# EAGLE board Roomba2 (EAGLE 9.6.2)
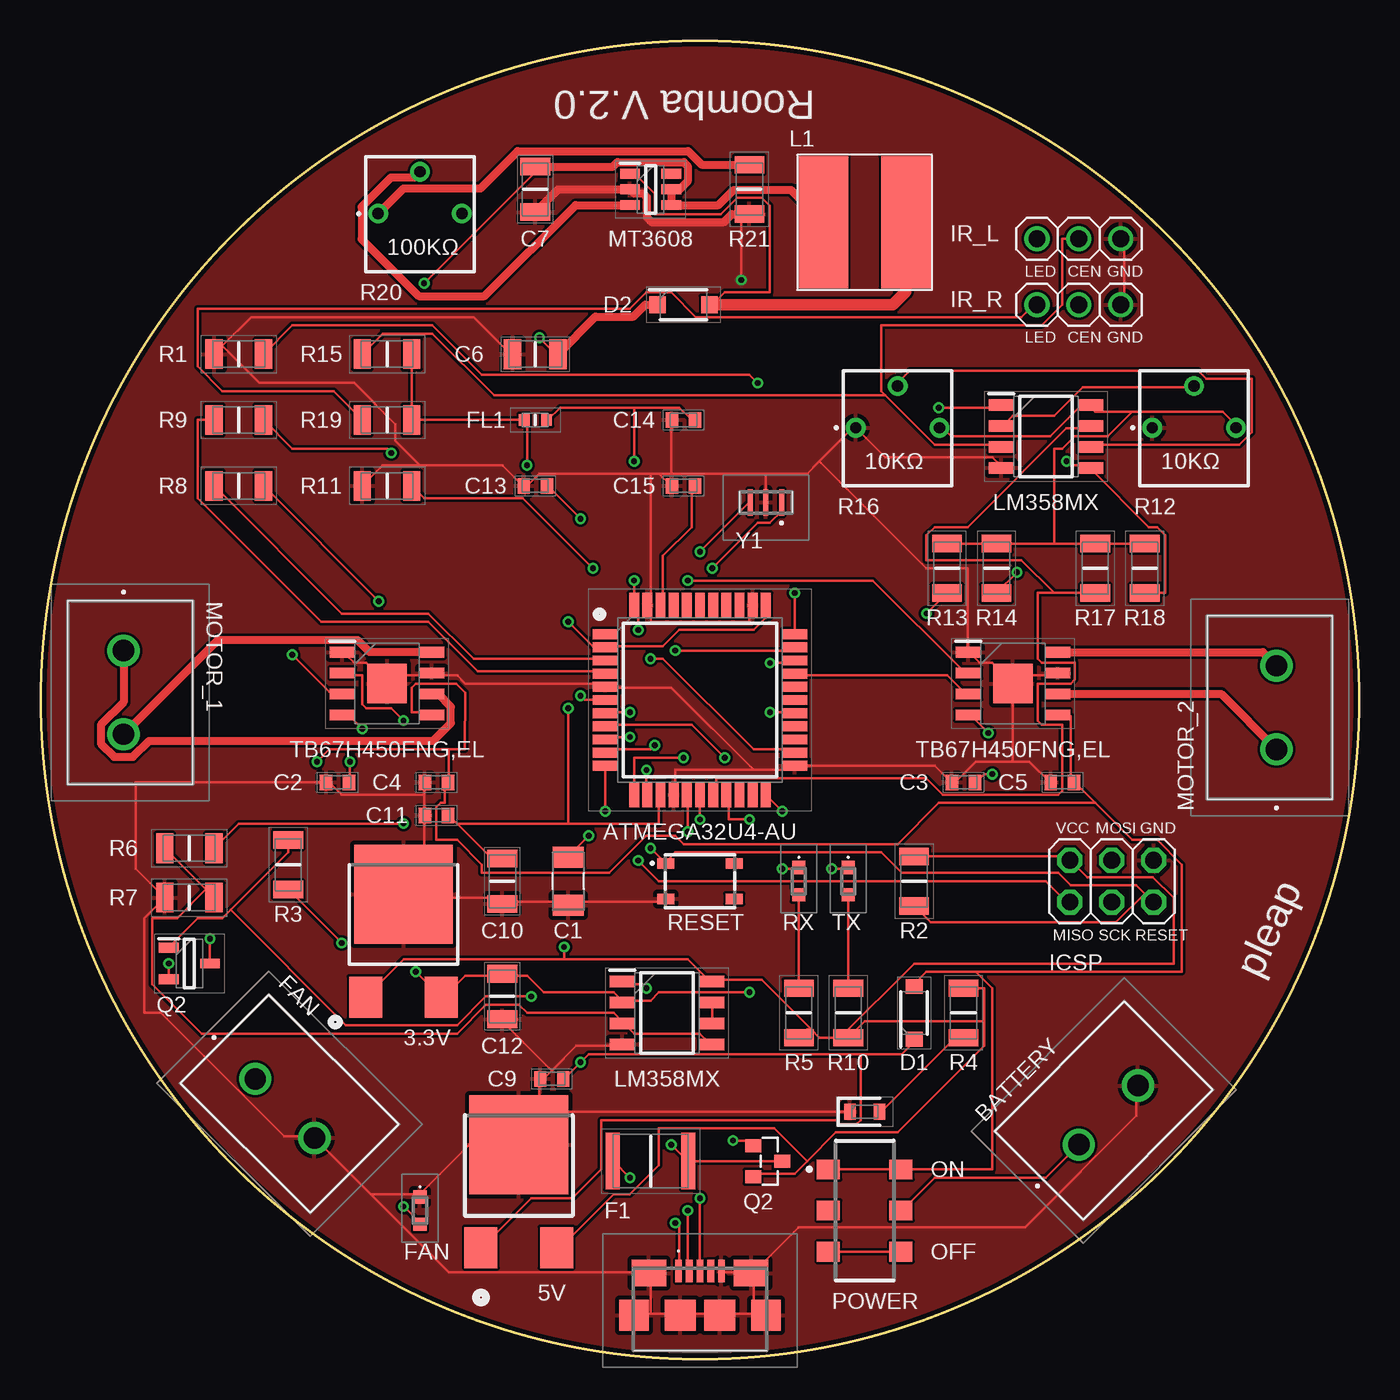
[diagram p0: board, top side]
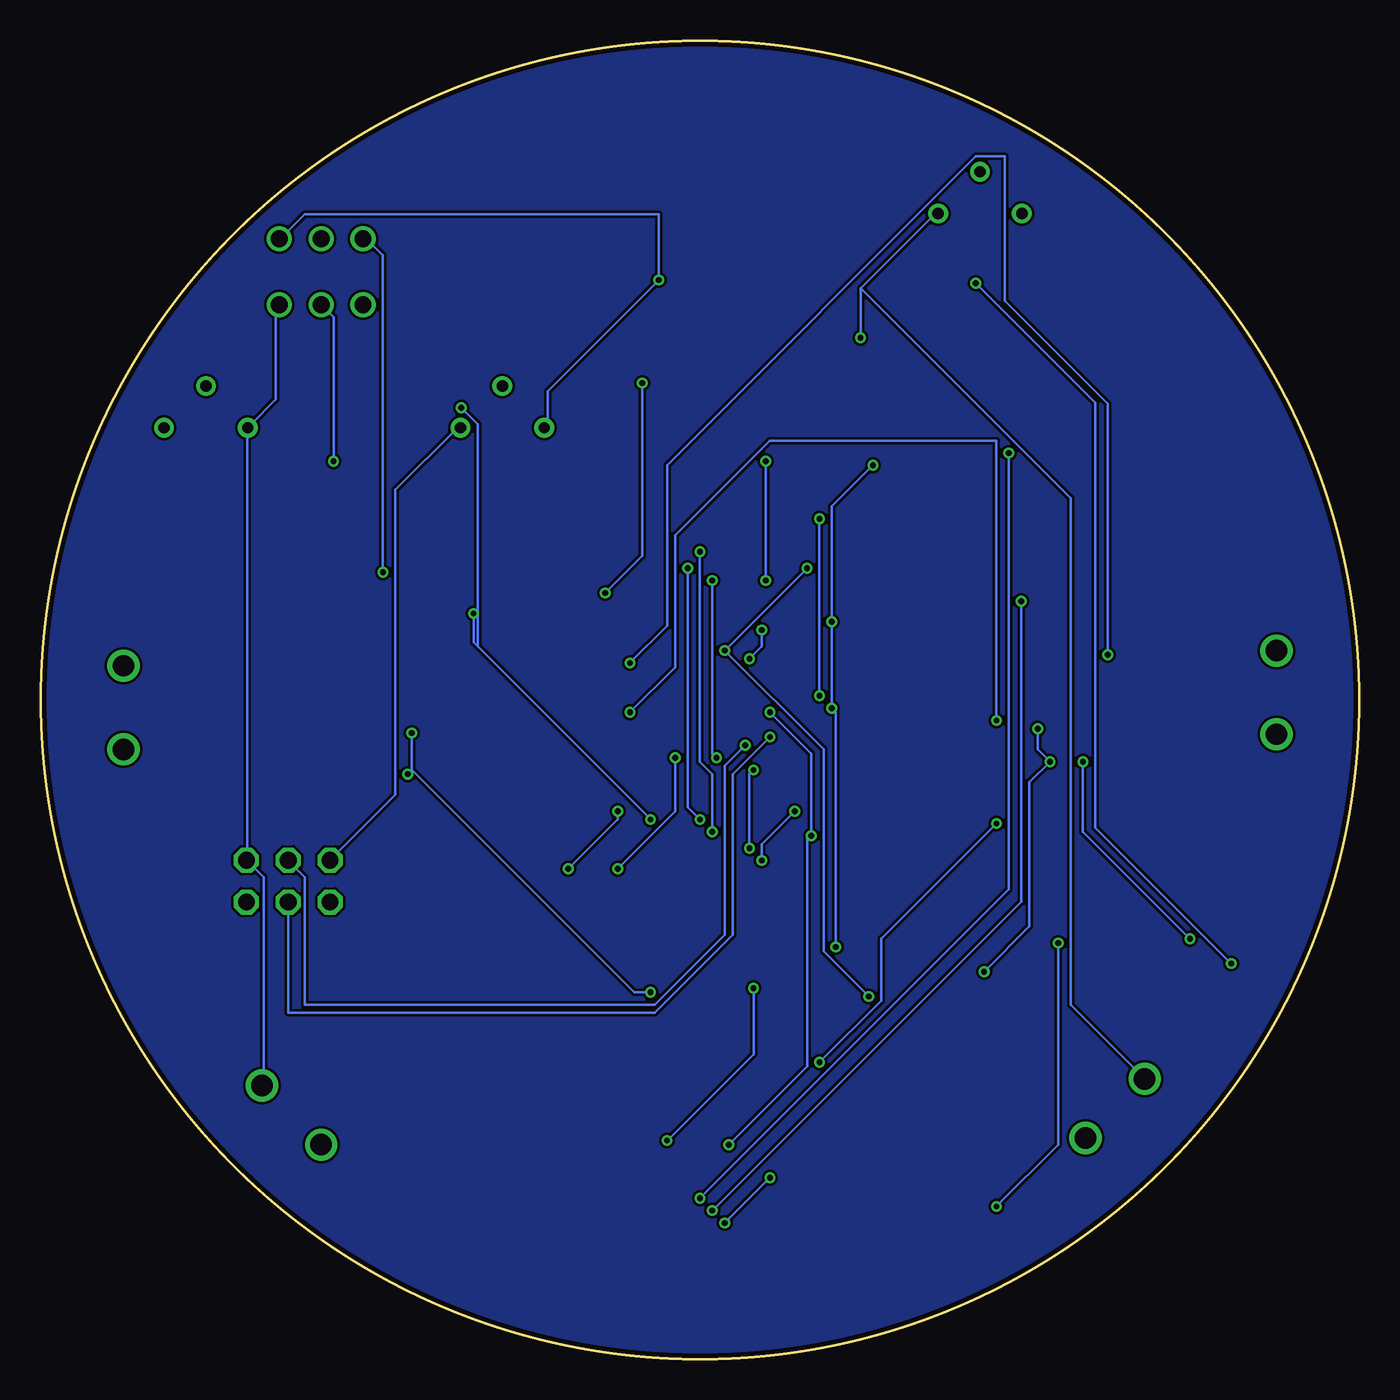
[diagram p1: board, bottom side, seen from below]

Size 80 x 80 mm. Coordinates in mm from the lower left corner, seen from the top.
Outline: circle at 40,40 radius 40
Copper layers (1*16): Top 0.035mm / dielectric 1.5mm / Bottom 0.035mm
Design rules "Fusion_PCB": minimum track width 6mil, minimum drill 12mil, track to track 6mil, track to pad 6mil, pad to pad 6mil, via to via 6mil, smd to smd 0mil, copper to edge 10mil, drill to drill 10mil, minimum pad ring 10mil, minimum via ring 6mil, stop-mask expansion 2mil, vias tented up to drill 100mil, thermal gap 10mil

## Footprints (pad centres in the part's own frame; a part is rotated, then mirrored left to right if it is on the bottom)
CAPC3216X190N = smd 1.29 x 1.91: 1 -1.46,0; 2 1.46,0
CAPC1608X90N = smd 0.75 x 0.94: 1 -0.7,0; 2 0.7,0
CAPC3216X180N = smd 1.07 x 1.82: 1 -1.38,0; 2 1.38,0
SODFL3516X90N = smd 0.9 x 1.04: 1 -1.6,0; 2 1.6,0
SODFL3618X108N = smd 1 x 1.04: 1 -1.575,0; 2 1.575,0
FUSC4632X110N = smd 0.85 x 3.43: 1 -2.3,0; 2 2.3,0
BLM18AG102BH1D = smd 0.65 x 0.7: 1 -0.675,0; 2 0.675,0
SOIC127P600X175-8N = smd 1.525 x 0.7: 1 -2.712,1.905; 2 -2.712,0.635; 3 -2.712,-0.635; 4 -2.712,-1.905; 5 2.712,-1.905; 6 2.712,-0.635; 7 2.712,0.635; 8 2.712,1.905
TO-252-3-L1_1 = smd 2 x 2.5: 1 -2.3,-6.25; 2 2.3,-6.25 | smd 6 x 6: 3 0,0
TO-252-3-L1 = smd 2 x 2.5: 1 -2.3,-8.05; 2 2.3,-8.05 | smd 6 x 6: 3 0,-1.8
QFP80P1200X1200X120-44N = smd 1.5 x 0.6: 1 -5.75,4; 2 -5.75,3.2; 3 -5.75,2.4; 4 -5.75,1.6; 5 -5.75,0.8; 6 -5.75,0; 7 -5.75,-0.8; 8 -5.75,-1.6; 9 -5.75,-2.4; 10 -5.75,-3.2; 11 -5.75,-4; 23 5.75,-4; 24 5.75,-3.2; 25 5.75,-2.4; 26 5.75,-1.6; 27 5.75,-0.8; 28 5.75,0; 29 5.75,0.8; 30 5.75,1.6; 31 5.75,2.4; 32 5.75,3.2; 33 5.75,4 | smd 0.6 x 1.5: 12 -4,-5.75; 13 -3.2,-5.75; 14 -2.4,-5.75; 15 -1.6,-5.75; 16 -0.8,-5.75; 17 0,-5.75; 18 0.8,-5.75; 19 1.6,-5.75; 20 2.4,-5.75; 21 3.2,-5.75; 22 4,-5.75; 34 4,5.75; 35 3.2,5.75; 36 2.4,5.75; 37 1.6,5.75; 38 0.8,5.75; 39 0,5.75; 40 -0.8,5.75; 41 -1.6,5.75; 42 -2.4,5.75; 43 -3.2,5.75; 44 -4,5.75
SOIC127P600X175-9N = smd 1.525 x 0.65: 1 -2.712,1.905; 2 -2.712,0.635; 3 -2.712,-0.635; 4 -2.712,-1.905; 5 2.712,-1.905; 6 2.712,-0.635; 7 2.712,0.635; 8 2.712,1.905 | smd 2.39 x 2.39: 9 0,0
TB11122U11 = drill 1.3 pad 1.95: 1 0,0; 2 5.08,0
ZX62B5PA33 = smd 0.4 x 1.35: 1 -1.3,2.325; 2 -0.65,2.325; 3 0,2.325; 4 0.65,2.325; 5 1.3,2.325 | smd 1.8 x 1.9: MP1 -4,-0.35; MP2 4,-0.35 | smd 2.1 x 1.6: MP3 -3.1,2.2; MP4 3.1,2.2 | smd 1.9 x 1.9: MP5 -1.2,-0.35; MP6 1.2,-0.35
2X03 = drill 1.016 octagon: 1 -2.54,-1.27; 2 -2.54,1.27; 3 0,-1.27; 4 0,1.27; 5 2.54,-1.27; 6 2.54,1.27
1X03 = drill 1.016: 1 -2.54,0; 2 0,0; 3 2.54,0
INDUCTOR_22UH = smd 3 x 8: P$1 -2.5,0; P$2 2.5,0
SMLE12Y8WT86 = smd 0.8 x 0.8: 1 0,0.825; 2 0,-0.825
LEDC1608X36N = smd 0.7 x 0.95: 1 -0.9,0; 2 0.9,0
SOT95P280X125-3N = smd 1.2 x 0.6: 1 -1.25,0.95; 2 -1.25,-0.95; 3 1.25,0
SOT95P237X112-3N = smd 0.972 x 0.802: 1 -0.772,0.94; 2 -0.772,-0.94; 3 0.99,0
RESC3216X60N = smd 1.05 x 1.8: 1 -1.5,0; 2 1.5,0
3362P_1 = drill 0.69 pad 1.12: 1 -2.54,3.53; 2 0,6.07; 3 2.54,3.53
SSSS213202 = smd 1.2 x 1.4: 1 -2.5,-2.2; 2 0,-2.2; 3 2.5,-2.2; 4 -2.5,2.2; 5 0,2.2; 6 2.5,2.2
SMT(4.2X3.2) = smd 1.05 x 0.65: 1 -2.075,1.075; 2 2.075,1.075; 3 -2.075,-1.075; 4 2.075,-1.075
SOT95P280X145-6N = smd 1.2 x 0.6: 1 -1.25,0.95; 2 -1.25,0; 3 -1.25,-0.95; 4 1.25,-0.95; 5 1.25,0; 6 1.25,0.95
CSTCE16M0V53R0 = smd 0.3 x 1.6: 1 0.95,0; 2 0,0; 3 -0.95,0

## Placement (x,y rotation side)
C1  GRM31CR61A107MEA8L  [CAPC3216X190N]  32,29 90 top
C2  GRM188F11H104ZA01B  [CAPC1608X90N]  18,35 0 top
C3  GRM188F11H104ZA01B  [CAPC1608X90N]  56,35 0 top
C4  GRM188F11H104ZA01B  [CAPC1608X90N]  24,35 0 top
C5  GRM188F11H104ZA01B  [CAPC1608X90N]  62,35 0 top
C6  GRM31CB31E226KE15L  [CAPC3216X180N]  30,61 0 top
C7  GRM31CB31E226KE15L  [CAPC3216X180N]  30,71 90 top
C9  GRM188F11H104ZA01B  [CAPC1608X90N]  31,17 0 top
C10  GRM31CB31A476KE15L  [CAPC3216X180N]  28,29 90 top
C11  GRM188F11H104ZA01B  [CAPC1608X90N]  24,33 0 top
C12  GRM31CB31A476KE15L  [CAPC3216X180N]  28,22 90 top
C13  GRM188R71E105KA12D  [CAPC1608X90N]  30,53 0 top
C14  GRM188R71E105KA12D  [CAPC1608X90N]  39,57 0 top
C15  GRM188F11H104ZA01B  [CAPC1608X90N]  39,53 0 top
D1  RB160M-30TR  [SODFL3516X90N]  53,21 90 top
D2  SS2040FL  [SODFL3618X108N]  39,64 0 top
F1  MF-MSMF010-2  [FUSC4632X110N]  37,12 0 top
FL1  BLM18PG600SN1D  [BLM18AG102BH1D]  30,57 0 top
IC1  LM358MX  [SOIC127P600X175-8N]  61,56 0 top
IC9  LM358MX  [SOIC127P600X175-8N]  38,21 0 top
IC10  NJM2391DL1-05-TE1  [TO-252-3-L1_1]  29,13 0 top
IC11  NJM2391DL1-33-TE1  [TO-252-3-L1]  22,30 0 top
IC12  ATMEGA32U4-AU  [QFP80P1200X1200X120-44N]  40,40 0 top
IC13  TB67H450FNG,EL  [SOIC127P600X175-9N]  21,41 0 top
IC14  TB67H450FNG,EL  [SOIC127P600X175-9N]  59,41 0 top
J1  TB111-2-2-U-1-1  [TB11122U11]  13,17 315 top
J2  TB111-2-2-U-1-1  [TB11122U11]  63,13 45 top
J4  ZX62-B-5PA_33_  [ZX62B5PA33]  40,3 0 top
J7  TB111-2-2-U-1-1  [TB11122U11]  5,43 270 top
J8  TB111-2-2-U-1-1  [TB11122U11]  75,37 90 top
JP1  ICSP  [2X03]  65,29 0 top
JP3  IR_L  [1X03]  63,68 0 top
JP4  IR_R  [1X03]  63,64 0 top
L1  INDUCTOR_22UH  [INDUCTOR_22UH]  50,69 0 top
LED1  SML-E12Y8WT86  [SMLE12Y8WT86]  23,9 0 top
LED2  SML-E12P8WT86  [LEDC1608X36N]  50,15 0 top
LED3  SML-E12Y8WT86  [SMLE12Y8WT86]  46,29 0 top
LED4  SML-E12Y8WT86  [SMLE12Y8WT86]  49,29 0 top
Q1  AO3400A  [SOT95P280X125-3N]  9,24 0 top
Q2  IRLML2246TRPBF  [SOT95P237X112-3N]  44,12 0 top
R1  CRCW120610K0FKEA  [RESC3216X60N]  12,61 0 top
R2  CRCW120610K0FKEA  [RESC3216X60N]  53,29 90 top
R3  [RESC3216X60N]  15,30 90 top
R4  [RESC3216X60N]  56,21 90 top
R5  [RESC3216X60N]  46,21 270 top
R6  CRCW120610K0FKEA  [RESC3216X60N]  9,31 0 top
R7  CRCW120610K0FKEA  [RESC3216X60N]  9,28 0 top
R8  CRCW120622R0FKEA  [RESC3216X60N]  12,53 0 top
R9  CRCW120622R0FKEA  [RESC3216X60N]  12,57 0 top
R10  [RESC3216X60N]  49,21 270 top
R11  CRCW120610K0FKEA  [RESC3216X60N]  21,53 0 top
R12  3362P-1-103  [3362P_1]  70,53 0 top
R13  CRCW120610K0FKEA  [RESC3216X60N]  55,48 90 top
R14  CRCW1206100RFKEB  [RESC3216X60N]  58,48 90 top
R15  CRCW120610K0FKEA  [RESC3216X60N]  21,61 0 top
R16  3362P-1-103  [3362P_1]  52,53 0 top
R17  CRCW120610K0FKEA  [RESC3216X60N]  64,48 90 top
R18  CRCW120610K0FKEA  [RESC3216X60N]  67,48 90 top
R19  CRCW1206100RFKEB  [RESC3216X60N]  21,57 0 top
R20  3362P-1-104LF  [3362P_1]  23,66 0 top
R21  CRCW12062K20FKEA  [RESC3216X60N]  43,71 90 top
S1  SSSS213202  [SSSS213202]  50,9 270 top
S2  SKRPACE010  [SMT(4.2X3.2)]  40,29 0 top
U1  MT3608  [SOT95P280X145-6N]  37,71 0 top
Y1  CSTCE16M0V53-R0  [CSTCE16M0V53R0]  44,52 0 top

## Library data of the parts
C1 = Roomba; AVAILABILITY: Warning; DESCRIPTION: SMD capacitor X5R(EIA) with capacitance 100uF Tol.20%. Rated voltage 10Vdc 85C; MF: Murata; MP: GRM31CR61A107MEA8L; PACKAGE: 3216 Murata; PRICE: None; PURCHASE-URL: https://pricing.snapeda.com/search/part/GRM31CR61A107MEA8L/?ref=eda
C2-C5 C9 C11 C15 = Roomba; DESCRIPTION: Multilayer Ceramic Capacitors MLCC - SMD/SMT; HEIGHT: 0.9mm; MANUFACTURER_NAME: Murata Electronics; MANUFACTURER_PART_NUMBER: GRM188F11H104ZA01B; MOUSER_PART_NUMBER: N/A; MOUSER_PRICE-STOCK: https://www.mouser.co.uk/ProductDetail/Murata-Electronics/GRM188F11H104ZA01B?qs=UOvNgVTuGCqVoWhVMGXegg%3D%3D
C6 C7 = Roomba; DESCRIPTION: Murata 3216 GRM 22000nF Ceramic Multilayer Capacitor, 25 V dc, +85C, B Dielectric, +/-10%; HEIGHT: 1.8mm; MANUFACTURER_NAME: Murata Electronics; MANUFACTURER_PART_NUMBER: GRM31CB31E226KE15L; MOUSER_PART_NUMBER: N/A; MOUSER_PRICE-STOCK: https://www.mouser.co.uk/ProductDetail/Murata-Electronics/GRM31CB31E226KE15L?qs=fAHHVMwC%252BbgqI79YXJEP1g%3D%3D
C10 C12 = Roomba; DESCRIPTION: Murata GRM31CB31A476KE15L 47F Ceramic Multilayer Capacitor 10V dc +/-10% Tolerance SMD; HEIGHT: 1.8mm; MANUFACTURER_NAME: Murata Electronics; MANUFACTURER_PART_NUMBER: GRM31CB31A476KE15L; MOUSER_PART_NUMBER: N/A; MOUSER_PRICE-STOCK: https://www.mouser.co.uk/ProductDetail/Murata-Electronics/GRM31CB31A476KE15L/?qs=d0WKAl%252BL4KY0D4rzetl%2F5Q%3D%3D
C13 C14 = Roomba; ARROW_PART_NUMBER: GRM188R71E105KA12D; ARROW_PRICE-STOCK: https://www.arrow.com/en/products/grm188r71e105ka12d/murata-manufacturing; DESCRIPTION: Ceramic SMT capacitor 1uF 25Vdc Murata 0603 GRM 1uF Ceramic Multilayer Capacitor, 25 V dc, +125degC, X7R Dielectric, /-10%; HEIGHT: 0.9mm; MANUFACTURER_NAME: Murata Electronics; MANUFACTURER_PART_NUMBER: GRM188R71E105KA12D; MOUSER_PART_NUMBER: 81-GRM188R71E105KA2D; MOUSER_PRICE-STOCK: https://www.mouser.co.uk/ProductDetail/Murata-Electronics/GRM188R71E105KA12D/?qs=62qOe8%2Fl8sHaxJyNXtrK%2FQ%3D%3D
D1 = Roomba; DESCRIPTION: ROHM - RB160M-30TR - DIODE, SCHOTTKY, PMDS; HEIGHT: 0.9mm; MANUFACTURER_NAME: ROHM Semiconductor; MANUFACTURER_PART_NUMBER: RB160M-30TR; MOUSER_PART_NUMBER: 755-RB160M-30TR; MOUSER_PRICE-STOCK: https://www.mouser.co.uk/ProductDetail/ROHM-Semiconductor/RB160M-30TR?qs=4kLU8WoGk0udVOFL%252BfJJKQ%3D%3D
D2 = Roomba; DESCRIPTION: surface mount schottky barrier rectifier; HEIGHT: 1.08mm; MANUFACTURER_NAME: PANJIT; MANUFACTURER_PART_NUMBER: SS2040FL
F1 = Roomba; ARROW_PART_NUMBER: MF-MSMF010-2; ARROW_PRICE-STOCK: https://www.arrow.com/en/products/mf-msmf010-2/bourns; DESCRIPTION: PTC Resettable Fuse 0.1A(hold) 0.3A(trip) 60V 40A 0.8W 1.5s 0.7Ohm SMD Solder Pad 1812 T/R Automotive; HEIGHT: 1.1mm; MANUFACTURER_NAME: Bourns; MANUFACTURER_PART_NUMBER: MF-MSMF010-2; MOUSER_PART_NUMBER: 652-MF-MSMF010-2; MOUSER_PRICE-STOCK: https://www.mouser.co.uk/ProductDetail/Bourns/MF-MSMF010-2/?qs=mkjPM10ZYVYU4yEEad9W7w%3D%3D
FL1 = Roomba; ARROW_PART_NUMBER: BLM18PG600SN1D; ARROW_PRICE-STOCK: https://www.arrow.com/en/products/blm18pg600sn1d/murata-manufacturing; DESCRIPTION: BLM18_N1D Series EMI Suppression Filter 60(Typ.) at 100MHz 1A @85; HEIGHT: 0.95mm; MANUFACTURER_NAME: Murata Electronics; MANUFACTURER_PART_NUMBER: BLM18PG600SN1D; MOUSER_PART_NUMBER: 81-BLM11P600S; MOUSER_PRICE-STOCK: https://www.mouser.co.uk/ProductDetail/Murata-Electronics/BLM18PG600SN1D?qs=LbqjZSvnDsxC2SXhhViR%252BA%3D%3D
IC1 IC9 = Roomba; ARROW_PART_NUMBER: LM358MX; ARROW_PRICE-STOCK: https://www.arrow.com/en/products/lm358mx/on-semiconductor; DESCRIPTION: ON SEMICONDUCTOR - LM358MX. - OP AMP, 0.6V/uS, SOIC-8, FULL REEL; HEIGHT: 1.75mm; MANUFACTURER_NAME: ON Semiconductor; MANUFACTURER_PART_NUMBER: LM358MX; MOUSER_PART_NUMBER: 512-LM358MX; MOUSER_PRICE-STOCK: https://www.mouser.co.uk/ProductDetail/ON-Semiconductor-Fairchild/LM358MX/?qs=k6rL%2Fc%252BPp3K5YsPvcEtWGQ%3D%3D
IC10 = Roomba; 5V: 5V; DESCRIPTION: LDO Regulator Pos 5V 1A 3-Pin TO-252 New Japan Radio NJM2391DL1-05-TE1, LDO Voltage Regulator, 1A, 5 V +/-1%, 3-Pin TO-252; HEIGHT: mm; MANUFACTURER_NAME: New Japan Radio; MANUFACTURER_PART_NUMBER: NJM2391DL1-05-TE1; MOUSER_PART_NUMBER: 513-NJM2391DL105-TE1; MOUSER_PRICE-STOCK: https://www.mouser.co.uk/ProductDetail/NJR/NJM2391DL1-05-TE1/?qs=7x5O%252BBkfEwv1AzCX%2FO1wrg%3D%3D
IC11 = Roomba; 3V3: 3.3V; DESCRIPTION: LDO Voltage Regulators LDO; HEIGHT: mm; MANUFACTURER_NAME: New Japan Radio; MANUFACTURER_PART_NUMBER: NJM2391DL1-33-TE1; MOUSER_PART_NUMBER: 513-NJM2391DL133-TE1; MOUSER_PRICE-STOCK: https://www.mouser.co.uk/ProductDetail/NJR/NJM2391DL1-33-TE1?qs=l%2FzmVEvW4JpmmNoqbD2bKw%3D%3D
IC12 = Roomba; ARROW_PART_NUMBER: ATMEGA32U4-AU; ARROW_PRICE-STOCK: https://www.arrow.com/en/products/atmega32u4-au/microchip-technology; DESCRIPTION: MCU AVR 32K FLASH 16MHZ 44-TQFP Atmel ATMEGA32U4-AU, 8bit AVR Microcontroller, 16MHz, 1 kB, 32 kB Flash, 44-Pin TQFP; HEIGHT: 1.2mm; MANUFACTURER_NAME: Microchip; MANUFACTURER_PART_NUMBER: ATMEGA32U4-AU; MOUSER_PART_NUMBER: 556-ATMEGA32U4-AU; MOUSER_PRICE-STOCK: https://www.mouser.co.uk/ProductDetail/Microchip-Technology-Atmel/ATMEGA32U4-AU/?qs=SSucg2PyLi7mKWjHIsNJ3w%3D%3D
IC13 IC14 = Roomba; ARROW_PART_NUMBER: TB67H450FNG,EL; ARROW_PRICE-STOCK: https://www.arrow.com/en/products/tb67h450fngel/toshiba; DESCRIPTION: Motor / Motion / Ignition Controllers & Drivers Brushed Motor Driver IC, 50V, 3.5A, TSSOP8 Package, PB-FREE; HEIGHT: 1.75mm; MANUFACTURER_NAME: Toshiba; MANUFACTURER_PART_NUMBER: TB67H450FNG,EL; MOUSER_PART_NUMBER: 757-TB67H450FNGEL; MOUSER_PRICE-STOCK: https://www.mouser.co.uk/ProductDetail/Toshiba/TB67H450FNGEL?qs=h6V4JsTaLXeReNg2bp0jug%3D%3D
J1 = Roomba; DESCRIPTION: Rated voltage: 300VAC Rated current: 15A; FAN: FAN; HEIGHT: 10mm; MANUFACTURER_NAME: Alphaplus; MANUFACTURER_PART_NUMBER: TB111-2-2-U-1-1
J2 = Roomba; BATTERY: BATTERY; DESCRIPTION: Rated voltage: 300VAC Rated current: 15A; HEIGHT: 10mm; MANUFACTURER_NAME: Alphaplus; MANUFACTURER_PART_NUMBER: TB111-2-2-U-1-1
J4 = Roomba; DESCRIPTION: USB Connectors MICRO B RECEPT RA SMT BTTM MNT; HEIGHT: 3mm; MANUFACTURER_NAME: Hirose; MANUFACTURER_PART_NUMBER: ZX62-B-5PA(33); MOUSER_PART_NUMBER: 798-ZX62-B-5PA33; MOUSER_PRICE-STOCK: https://www.mouser.co.uk/ProductDetail/Hirose-Connector/ZX62-B-5PA33/?qs=IvjI65BR3TWOr0fx8JTXXw%3D%3D
J7 = Roomba; DESCRIPTION: Rated voltage: 300VAC Rated current: 15A; HEIGHT: 10mm; MANUFACTURER_NAME: Alphaplus; MANUFACTURER_PART_NUMBER: TB111-2-2-U-1-1; MOTOR_1: MOTOR_1
J8 = Roomba; DESCRIPTION: Rated voltage: 300VAC Rated current: 15A; HEIGHT: 10mm; MANUFACTURER_NAME: Alphaplus; MANUFACTURER_PART_NUMBER: TB111-2-2-U-1-1; MOTOR_2: MOTOR_2
JP1 = pinhead; GND: GND; MISO: MISO; MOSI: MOSI; RESET: RESET; SCK: SCK; VCC: VCC
JP3 JP4 = adafruit; CEN: CEN; GND: GND; LED: LED
L1 = Roomba; L1: L1
LED1 = Roomba; ARROW_PART_NUMBER: SML-E12Y8WT86; ARROW_PRICE-STOCK: https://www.arrow.com/en/products/sml-e12y8wt86/rohm-semiconductor; DESCRIPTION: ROHM - SML-E12Y8WT86 - LED, YELLOW, 63MCD, 590NM, 1608; FAN: FAN; HEIGHT: 0mm; MANUFACTURER_NAME: ROHM Semiconductor; MANUFACTURER_PART_NUMBER: SML-E12Y8WT86; MOUSER_PART_NUMBER: 755-SML-E12Y8WT86; MOUSER_PRICE-STOCK: https://www.mouser.co.uk/ProductDetail/ROHM-Semiconductor/SML-E12Y8WT86/?qs=4kLU8WoGk0tv2Hg21kpX1Q%3D%3D
LED2 = Roomba; ARROW_PART_NUMBER: SML-E12P8WT86; ARROW_PRICE-STOCK: https://www.arrow.com/en/products/sml-e12p8wt86/rohm-semiconductor; DESCRIPTION: Standard LEDs - SMD SMD Green 2.5-16 mcd; HEIGHT: 0.36mm; MANUFACTURER_NAME: ROHM Semiconductor; MANUFACTURER_PART_NUMBER: SML-E12P8WT86; MOUSER_PART_NUMBER: 755-SML-E12P8WT86; MOUSER_PRICE-STOCK: https://www.mouser.co.uk/ProductDetail/ROHM-Semiconductor/SML-E12P8WT86?qs=4kLU8WoGk0vBFbk40ZI0Fw%3D%3D
LED3 = Roomba; ARROW_PART_NUMBER: SML-E12Y8WT86; ARROW_PRICE-STOCK: https://www.arrow.com/en/products/sml-e12y8wt86/rohm-semiconductor; DESCRIPTION: ROHM - SML-E12Y8WT86 - LED, YELLOW, 63MCD, 590NM, 1608; HEIGHT: 0mm; MANUFACTURER_NAME: ROHM Semiconductor; MANUFACTURER_PART_NUMBER: SML-E12Y8WT86; MOUSER_PART_NUMBER: 755-SML-E12Y8WT86; MOUSER_PRICE-STOCK: https://www.mouser.co.uk/ProductDetail/ROHM-Semiconductor/SML-E12Y8WT86/?qs=4kLU8WoGk0tv2Hg21kpX1Q%3D%3D; RX: RX
LED4 = Roomba; ARROW_PART_NUMBER: SML-E12Y8WT86; ARROW_PRICE-STOCK: https://www.arrow.com/en/products/sml-e12y8wt86/rohm-semiconductor; DESCRIPTION: ROHM - SML-E12Y8WT86 - LED, YELLOW, 63MCD, 590NM, 1608; HEIGHT: 0mm; MANUFACTURER_NAME: ROHM Semiconductor; MANUFACTURER_PART_NUMBER: SML-E12Y8WT86; MOUSER_PART_NUMBER: 755-SML-E12Y8WT86; MOUSER_PRICE-STOCK: https://www.mouser.co.uk/ProductDetail/ROHM-Semiconductor/SML-E12Y8WT86/?qs=4kLU8WoGk0tv2Hg21kpX1Q%3D%3D; TX: TX
Q1 = Roomba; ARROW_PART_NUMBER: AO3400A; ARROW_PRICE-STOCK: https://www.arrow.com/en/products/ao3400a/alpha-and-omega-semiconductor; DESCRIPTION: 30V N-Channel MOSFET; HEIGHT: 1.25mm; MANUFACTURER_NAME: Alpha & Omega Semiconductors; MANUFACTURER_PART_NUMBER: AO3400A; Q2: Q2
Q2 = Roomba; ARROW_PART_NUMBER: IRLML2246TRPBF; ARROW_PRICE-STOCK: https://www.arrow.com/en/products/irlml2246trpbf/infineon-technologies-ag; DESCRIPTION: HEXFET Power MOSFET; HEIGHT: mm; MANUFACTURER_NAME: Infineon; MANUFACTURER_PART_NUMBER: IRLML2246TRPBF; MOUSER_PART_NUMBER: 942-IRLML2246TRPBF; MOUSER_PRICE-STOCK: https://www.mouser.co.uk/ProductDetail/Infineon-IR/IRLML2246TRPBF/?qs=9%252BKlkBgLFf2Ex57ZuAl57A%3D%3D
R1 R2 R6 R7 R11 R13 R15 R17 R18 = Roomba; ARROW_PART_NUMBER: CRCW120610K0FKEA; ARROW_PRICE-STOCK: https://www.arrow.com/en/products/crcw120610k0fkea/vishay; DESCRIPTION: CRCW1206 Resistor T/R 0.25W,1%,10K Vishay CRCW Series Thick Film Surface Mount Resistor 1206 Case 10k +/-1% 0.25W +/-100ppm/C; HEIGHT: 0.6mm; MANUFACTURER_NAME: Vishay; MANUFACTURER_PART_NUMBER: CRCW120610K0FKEA; MOUSER_PART_NUMBER: 71-CRCW1206-10K-E3; MOUSER_PRICE-STOCK: https://www.mouser.co.uk/ProductDetail/Vishay-Dale/CRCW120610K0FKEA/?qs=ODaLBy2SlZHPHItpfGW8KQ%3D%3D
R3-R5 R10 = Roomba; ARROW_PART_NUMBER: CRCW12061K00FKEA; ARROW_PRICE-STOCK: https://www.arrow.com/en/products/crcw12061k00fkea/vishay; DESCRIPTION: CRCW1206 Resistor T/R 0.25W,1%,1K Vishay CRCW Series Thick Film Surface Mount Resistor 1206 Case 1k +/-1% 0.25W +/-100ppm/C; HEIGHT: 0.6mm; MANUFACTURER_NAME: Vishay; MANUFACTURER_PART_NUMBER: CRCW12061K00FKEA; MOUSER_PART_NUMBER: 71-CRCW1206-1.0K-E3; MOUSER_PRICE-STOCK: https://www.mouser.co.uk/ProductDetail/Vishay-Dale/CRCW12061K00FKEA/?qs=3XLFQ9LoC1z3na71DC8h0w%3D%3D
R8 R9 = Roomba; ARROW_PART_NUMBER: CRCW120622R0FKEA; ARROW_PRICE-STOCK: https://www.arrow.com/en/products/crcw120622r0fkea/vishay; DESCRIPTION: Vishay CRCW Series Thick Film Surface Mount Resistor 1206 Case 22 +/-1% 0.25W +/-100ppm/C; HEIGHT: 0.6mm; MANUFACTURER_NAME: Vishay; MANUFACTURER_PART_NUMBER: CRCW120622R0FKEA; MOUSER_PART_NUMBER: 71-CRCW1206-22-E3; MOUSER_PRICE-STOCK: https://www.mouser.co.uk/ProductDetail/Vishay-Dale/CRCW120622R0FKEA/?qs=bVxjDPCGUuIVF%2FMyHeEeCg%3D%3D
R12 R16 = Roomba; 10K: 10KΩ; ARROW_PART_NUMBER: 3362P-1-103; ARROW_PRICE-STOCK: https://www.arrow.com/en/products/3362p-1-103/bourns; DESCRIPTION: 3362P top adj cermet trimmer,10K 6mm; HEIGHT: mm; MANUFACTURER_NAME: Bourns; MANUFACTURER_PART_NUMBER: 3362P-1-103; MOUSER_PART_NUMBER: 652-3362P-1-103; MOUSER_PRICE-STOCK: https://www.mouser.co.uk/ProductDetail/Bourns/3362P-1-103?qs=Uf%2FsSBgPTJJhIGut%2FdpuEA%3D%3D
R14 R19 = Roomba; ARROW_PART_NUMBER: CRCW1206100RFKEB; ARROW_PRICE-STOCK: https://www.arrow.com/en/products/crcw1206100rfkeb/vishay; DESCRIPTION: VISHAY DALE - CRCW1206100RFKEB - RES, THICK FILM, 100R, 1%, 0.25W, 1206; HEIGHT: 0.6mm; MANUFACTURER_NAME: Vishay; MANUFACTURER_PART_NUMBER: CRCW1206100RFKEB; MOUSER_PART_NUMBER: 71-CRCW1206100RFKEB; MOUSER_PRICE-STOCK: https://www.mouser.co.uk/ProductDetail/Vishay-Dale/CRCW1206100RFKEB?qs=9Ncj7kJVcvfAq03QqDjzyQ%3D%3D
R20 = Roomba; 100K: 100KΩ; ARROW_PART_NUMBER: 3362P-1-104LF; ARROW_PRICE-STOCK: https://www.arrow.com/en/products/3362p-1-104lf/bourns; DESCRIPTION: 3362P top adj cermet trimmer 100K 6mm Bourns 3362P Series Through Hole Cermet Trimmer Resistor with Pin Terminations, 100k +/-10% 0.5W +/-100ppm/C Top Adjust; HEIGHT: mm; MANUFACTURER_NAME: Bourns; MANUFACTURER_PART_NUMBER: 3362P-1-104LF; MOUSER_PART_NUMBER: 652-3362P-1-104LF; MOUSER_PRICE-STOCK: https://www.mouser.co.uk/ProductDetail/Bourns/3362P-1-104LF?qs=j68eCxbdS5jNo4NAjRLKMA%3D%3D
R21 = Roomba; ARROW_PART_NUMBER: CRCW12062K20FKEA; ARROW_PRICE-STOCK: https://www.arrow.com/en/products/crcw12062k20fkea/vishay; DESCRIPTION: Vishay CRCW Series Thick Film Surface Mount Resistor 1206 Case 2.2k +/-1% 0.25W +/-100ppm/C; HEIGHT: 0.6mm; MANUFACTURER_NAME: Vishay; MANUFACTURER_PART_NUMBER: CRCW12062K20FKEA; MOUSER_PART_NUMBER: 71-CRCW1206-2.2K-E3; MOUSER_PRICE-STOCK: https://www.mouser.co.uk/ProductDetail/Vishay-Dale/CRCW12062K20FKEA?qs=rSCQ%2F9oRLB6P2jcqVGOOeQ%3D%3D
S1 = Roomba; DESCRIPTION: Slide Switches 1-pole 2-positions Surface Mount Slide Switch SPDT Maintained 0.3 A Slide; HEIGHT: mm; MANUFACTURER_NAME: ALPS; MANUFACTURER_PART_NUMBER: SSSS213202; MOUSER_PART_NUMBER: 688-SSSS213202; MOUSER_PRICE-STOCK: https://www.mouser.co.uk/ProductDetail/ALPS/SSSS213202?qs=6EGMNY9ZYDRKFJ9qebDCNQ%3D%3D; OFF: OFF; ON: ON; POWER: POWER
S2 = Roomba; ARROW_PART_NUMBER: SKRPACE010; ARROW_PRICE-STOCK: https://www.arrow.com/en/products/skrpace010/alps-electric; DESCRIPTION: Tactile Switches 4.2x3.2x2.5mm 260gf; HEIGHT: mm; MANUFACTURER_NAME: ALPS; MANUFACTURER_PART_NUMBER: SKRPACE010; MOUSER_PART_NUMBER: 688-SKRPACE010; MOUSER_PRICE-STOCK: https://www.mouser.co.uk/ProductDetail/ALPS/SKRPACE010?qs=dHDuPHwQO79W8iY66hDbLQ%3D%3D; RESET: RESET
U1 = Roomba; DESCRIPTION: High Efficiency 1.2MHz 2A Step Up Converter; HEIGHT: 1.45mm; MANUFACTURER_NAME: Aerosemi; MANUFACTURER_PART_NUMBER: MT3608
Y1 = Roomba; DESCRIPTION: CSTCE16M0V53-R0, Ceramic Resonator, 16MHz Expander 15pF, 3-Pin SMT, 3.2 x 1.3 x 0.9mm; HEIGHT: 1mm; MANUFACTURER_NAME: Murata Electronics; MANUFACTURER_PART_NUMBER: CSTCE16M0V53-R0; MOUSER_PART_NUMBER: 81-CSTCE16M0V53-R0; MOUSER_PRICE-STOCK: https://www.mouser.co.uk/ProductDetail/Murata-Electronics/CSTCE16M0V53-R0/?qs=HPA2Xx%252BU0WhPWbRcNuzhZw%3D%3D

## Nets
+3.3V: C2.2 C3.2 C12.2 IC9.2 IC11.2 IC13.4 IC14.4
A0: IC12.36
A1: IC12.37
A2: IC12.38
A3: IC12.39
A4: IC12.40
A5: IC12.41
BT+: C4.2 C5.2 D1.2 IC13.5 IC14.5 Q1.3 S1.1 S1.4
D0/RX: IC12.20
D1/TX: IC12.21
D4: IC12.25
D7: IC12.1
D8: IC12.28
D9: IC12.29
D12: IC12.26
FAN: IC12.32 Q1.1 R3.2 R11.2
GND: C1.1 C2.1 C3.1 C4.1 C5.1 C6.1 C7.1 C9.1 C10.1 C11.1 C12.1 C13.1 C14.1 C15.1 IC1.4 IC9.4 IC10.3 IC11.3 IC12.5 IC12.15 IC12.23 IC12.35 IC12.43 IC13.1 IC13.7 IC13.9 IC14.1 IC14.7 IC14.9 J1.2 J2.2 J4.5 J4.MP1 J4.MP2 J4.MP3 J4.MP4 J4.MP5 J4.MP6 JP1.6 JP3.3 JP4.3 LED1.1 LED2.1 R1.1 R7.1 R11.1 R12.1 R16.1 R21.1 S2.3 U1.2 Y1.2
HWB: IC12.33 R1.2
INV_IN: C7.2 L1.P$1 Q1.2 U1.4 U1.5
INV_OUT: C6.2 D2.1 J1.1 R20.3
IR_CEN_L: IC1.3 JP3.2 R15.1
IR_CEN_R: IC1.5 JP4.2 R18.1
IR_L: IC1.1 IC12.19 R13.1
IR_LED_L: JP3.1 R14.1
IR_LED_R: JP4.1 R19.1
IR_R: IC1.7 IC12.18 R17.1
MD2_IN1: IC12.30 IC14.3
MD2_IN2: IC12.12 IC14.2
MD_IN1: IC12.31 IC13.3
MD_IN2: IC12.27 IC13.2
MISO: IC12.11 JP1.1
MOSI: IC12.10 JP1.4
N$1: LED1.2 R3.1
N$2: LED2.2 R4.1
N$3: LED3.2 R5.1
N$4: LED4.2 R10.1
N$5: IC9.6 IC9.7
N$6: J2.1 S1.5
N$7: S1.3 S1.6
N$8: IC1.2 R12.2
N$12: IC1.6 R16.2
N$13: D2.2 L1.P$2 U1.1
N$15: IC9.3 IC9.5 R6.1 R7.2
N$16: C9.2 D1.1 IC10.1 R6.2
N$17: IC9.1 Q2.1
N$18: J4.2 R8.2
N$19: J4.3 R9.2
N$20: C13.2 IC12.6
N$21: C14.2 FL1.2 IC12.24 IC12.44
N$22: IC12.17 Y1.1
N$23: IC12.16 Y1.3
N$24: C15.2 IC12.42
N$25: IC13.6 J7.1
N$26: IC13.8 J7.2
N$27: IC14.8 J8.2
N$28: IC14.6 J8.1
N$31: R20.2 U1.3
N$32: R20.1 R21.2
RD+: IC12.4 R9.1
RD-: IC12.3 R8.1
RESET: IC12.13 JP1.5 R2.1 S2.1
RX-LED: IC12.8 LED3.1
SCK: IC12.9 JP1.3
TX-LED: IC12.22 LED4.1
VBUS: F1.1 J4.1
VBUSF: C1.2 F1.2 IC12.7 Q2.3
VCC: C10.2 C11.2 FL1.1 IC1.8 IC9.8 IC10.2 IC11.1 IC12.2 IC12.14 IC12.34 JP1.2 Q2.2 R2.2 R4.2 R5.2 R10.2 R12.3 R13.2 R14.2 R15.2 R16.3 R17.2 R18.2 R19.2

## Tracks (layer width: path | path; a pad name or v marks a point on that pad's centre or on a via)
+3.3V  (via drill 0.35)
  Top 0.152: v57.75,35.5 57.25,35.5 56.75,35 C3.2 | v57.5,38 56.5,39 IC14.4 | v18.75,36.25 18.75,35 C2.2 | v19.5,38.25 18.75,39 18.5,39 IC13.4 | 28,23.25 29.5,23.25 30.5,22.25 34.75,22.25 35.25,21.75 IC9.2 35.5,21.75 37,21.75 37.5,22.25 v43,22.25 | 28,23.25 25.75,23.25 24.5,22 IC11.2 v22.75,23.5 | 28,23.25 C12.2
  Bottom 0.152: v57.5,38 57.5,35.75 | v19.5,38.25 19.5,37 v18.75,36.25 20,35 20,26.25 v22.75,23.5 | 57.5,35.75 44,22.25 v43,22.25 | 57.5,35.75 v57.75,35.5
BOTTOM
  pour Bottom: 40,80 arc90 0,40 arc90 40,0 arc90 80,40 arc90
BT+  (via drill 0.35)
  Top 0.152: 24.75,37 24.75,35 C4.2 24.5,35 24.5,33.75 24.25,33.75 24,33.5 24,31.5 25.25,31.5 26.75,30 26.75,29.5 34.5,29.5 36.75,31.75 38.5,31.75 39,31.25 52,31.25 54.5,33.75 64,33.75 | IC13.5 23.5,39.25 22.5,39.25 22.5,40.75 22.75,41 25.2,41 25.75,40.45 25.73,37 24.75,37 | v10.25,25.5 Q1.3 | v16.75,36.25 17.5,37 24.75,37 | IC14.5 61.75,39 62.5,39 62.5,35 C5.2 62.75,35 64,33.75 | 56.75,23.5 53.75,23.5 53,22.75 D1.2 | 56.75,23.5 57.75,22.5 57.75,11.5 S1.4 S1.1 | 64,33.75 66.25,31.5 67.75,31.5 69.25,30 69.25,23.5 56.75,23.5
  Bottom 0.152: v10.25,25.5 16.75,32 v16.75,36.25
FAN  (via drill 0.35)
  Top 0.152: 11.5,27.25 15,30.75 R3.2 | 11.5,27.25 11,26.75 9.5,26.75 7.75,25 Q1.1 | v38.5,43 45.75,43 IC12.32 | v33.5,48 29.25,52.25 23.25,52.25 R11.2 | 11.5,27.25 18.5,20.25 25.25,20.25 27,22 v29.75,22
  Bottom 0.152: v33.5,48 v38.5,43 32.5,37 32.5,24.75 v29.75,22
GND  (via drill 0.35)
  Top 0.152: 23.25,34.25 23.25,35 C4.1 | 23.25,34.25 23.25,33 | 23.25,34.25 18.25,34.25 17.5,35 C2.1 5.75,35 5.75,29.75 R7.1 6.25,26.75 6.25,21 7.25,21 14.75,13.5 16.5,13.5 J1.2 16.75,13.25 20,10 | 32,27.75 37.75,27.75 S2.3 | 32,27.75 28,27.75 | 32,27.75 C1.1 | 28,27.75 27.75,28 23.25,28 | 23.25,28 22,28 IC11.3 23.25,28 | 28,27.75 C10.1 | 23.25,28 23.25,33 | 23.25,33 C11.1 | J4.5 41.25,5.25 43,5.25 J4.MP4 | 37,2.75 38.75,2.75 J4.MP5 39,2.75 41,2.75 J4.MP6 41.25,2.75 43.25,2.75 | 37,2.75 36,2.75 J4.MP1 | 43.25,2.75 44,2.75 J4.MP2 43.25,2.75 | 37,2.75 37,5 J4.MP3 36.75,5.25 24.75,5.25 20,10 | 43.25,2.75 43.25,5 J4.MP4 | 23,10 26,13 IC10.3 | 30.25,15 30.25,13 IC10.3 | 30.25,15 30.25,17 C9.1 30.5,17 31,17.5 | 30.25,15 LED2.1 | 30.25,15 IC10.3 | 31,17.5 32.5,19 35.25,19 IC9.4 | 31,17.5 28,20.5 C12.1 | 23,10 20,10 | 23,10 LED1.1 | JP3.3 65.75,68 65.75,64 JP4.3 | IC13.1 18.5,42.75 19,42.25 19.75,42.25 IC13.9 21.5,41.5 23.5,41.5 IC13.7 23.75,41.5 25.25,41.5 25.75,41 34.25,41 IC12.5 34.25,40.75 38.25,40.75 43.25,35.75 | 58.5,41.5 57.75,42.25 57,42.25 56.5,42.75 IC14.1 56.25,43 56.25,48 53.75,48 47.25,54.5 | 58.5,41.5 61.5,41.5 IC14.7 | 58.5,41.5 IC14.9 59,36.25 | 59,36.25 56.75,36.25 55.5,35 C3.1 55.25,35 54.25,36 IC12.23 45.5,35.75 43.25,35.75 | 59,36.25 60,36.25 61.25,35 C5.1 | 43.25,35.75 38.5,35.75 38.5,34.25 IC12.15 | 11,61.5 12.75,63.25 26.25,63.25 28.5,61 C6.1 | IC1.4 58.25,54.25 57.75,54.75 51.25,54.75 49.5,56.5 R16.1 49.25,56.5 47.25,54.5 | 37.5,53.75 37,53.75 | 37,53.75 30.25,53.75 29.5,53 C13.1 29.25,53 28,54.25 23,54.25 | 37.5,53.75 38.25,53 C15.1 | 38.25,53.75 38.25,57 C14.1 | 37.5,53.75 38.25,53.75 | 37,53.75 37,45.75
  Top 0.152: 43,45.75 43,44.75 37,44.75 37,45.75 | 37,45.75 IC12.43 | 44,53.75 Y1.2 | 38.25,53.75 44,53.75 | R11.1 20.75,54.25 23,54.25 | 47.25,54.5 46.5,53.75 44,53.75 | v42.5,65.5 42.5,69 R21.1 | 11,61.5 13.25,59.25 19,59.25 21.5,56.75 21.5,55.75 23,54.25 | 11,61.5 R1.1 | J4.MP4 43.25,5.25 46,8 59.75,8 66.5,14.75 66.5,16.5 J2.2
  Top 0.5: C7.1 31.38,71 U1.2 36,70.75 36.52,70.75 36.77,70.5 36.77,69.3 37.05,69.02 41.45,69.02 41.93,69.5 R21.1
  Bottom 0.152: JP4.3 65.75,64 65.75,58.25 67.25,56.75 R12.1 67.5,56.5 67.5,30.5 JP1.6 67.5,30.25 66.5,29.25 66.5,16.75 J2.2 | R16.1 49.25,56.75 49.25,58.75 v42.5,65.5 42.5,69.5 64,69.5 65.5,68 JP3.3
  pour Top: 40,80 arc90 0,40 arc90 40,0 arc90 80,40 arc90
HWB  (via drill 0.35)
  Top 0.152: v45.75,46.5 IC12.33 | v43.5,59.25 43,59.75 26.75,59.75 23.75,62.75 15.25,62.75 R1.2
  Bottom 0.152: v45.75,46.5 43.5,48.75 v43.5,59.25
INV_IN  (via drill 0.35)
  Top 0.152: v7.75,24 Q1.2 | v23.25,65.3 30,72.05 C7.2
  Top 0.5: L1.P$1 45.52,70.98 42.05,70.98 41.12,70.05 U1.4 U1.5 38.77,71 39.25,71.48 39.25,72.42 39.02,72.65 34.98,72.65 34.71,72.38 C7.2
  Bottom 0.152: v7.75,24 16,32.25 16,58.05 v23.25,65.3
INV_OUT  (via drill 0.35)
  Top 0.152: v30.25,62 31.25,61 C6.2
  Top 0.5: C6.2 33.65,63.27 35.95,63.27 36.68,64 D2.1
  Bottom 0.152: 30.25,65 25.75,69.5 R20.3 | v30.25,62 30.25,65 | J1.1 17.5,21.5 17.5,52.25 30.25,65
IR_CEN_L
  Top 0.152: 51.25,58.5 51,58.75 51,62.75 60.75,62.75 62,64 62,68 JP3.2 | 51.25,58.5 54.25,55.5 58.25,55.5 IC1.3 | R15.1 20.75,62.25 23.75,62.25 27.5,58.5 51.25,58.5
IR_CEN_R  (via drill 0.35)
  Top 0.152: R18.1 68.25,46.5 68.25,50 67.75,50.5 67.25,50.5 63.75,54 IC1.5 63.5,54.25 62.5,54.25 v62.25,54.5
  Bottom 0.152: JP4.2 62.25,63.25 v62.25,54.5
IR_L  (via drill 0.35)
  Top 0.152: v43,32.75 41.75,32.75 41.75,34.25 IC12.19 | R13.1 v53.75,45.25 | v54.5,57.75 58.25,57.75 IC1.1
  Bottom 0.152: 53.5,43.25 53.75,43.5 v53.75,45.25 | 53.5,43.25 v43,32.75 | v54.5,57.75 53.5,56.75 53.5,43.25
IR_LED_L  (via drill 0.35)
  Top 0.152: v59.25,47.75 R14.1
  Bottom 0.152: v59.25,47.75 59.25,67 60.25,68 JP3.1
IR_LED_R
  Top 0.152: R19.1 17.75,58.75 11,58.75 9.5,60.25 9.5,63.75 35.75,63.75 36.75,64.75 38.25,64.75 39.75,63.25 59.5,63.25 60.25,64 JP4.1
IR_R
  Top 0.152: R17.1 61.5,46.5 | 61.5,46.5 60.5,46.5 60.5,42.5 60.75,42.25 62.75,42.25 62.75,41.25 62.5,41 60.5,41 60.5,38.75 60.75,38.5 62,38.5 62,34.5 61.75,34.25 54.75,34.25 53.75,35.25 41,35.25 41,34.25 IC12.18 | 61.5,46.5 59.5,48.5 53.75,48.5 53.75,50 54.25,50.5 56.25,50.5 62.25,56.5 63.5,56.5 IC1.7
MD2_IN1
  Top 0.152: IC12.30 45.75,41.5 55,41.5 56,40.5 56.25,40.5 IC14.3
MD2_IN2  (via drill 0.35)
  Top 0.152: IC12.12 36,36.5 v39,36.5 | v39.25,47.25 50.5,47.25 56,41.75 56.25,41.75 IC14.2
  Bottom 0.152: v39,36.5 39.25,36.75 v39.25,47.25
MD_IN1  (via drill 0.35)
  Top 0.152: v44.25,42.25 45.75,42.25 IC12.31 | v15.25,42.75 17.5,40.5 18.25,40.5 IC13.3
  Bottom 0.152: v44.25,42.25 42,44.5 42,54.25 23.25,73 21.5,73 21.5,64.25 15.25,58 v15.25,42.75
MD_IN2  (via drill 0.35)
  Top 0.152: v44.25,39.25 45.75,39.25 IC12.27 | v22,38.75 21.25,39.5 19.75,39.5 19.5,39.75 19.5,41.5 18.5,41.5 IC13.2
  Bottom 0.152: v44.25,39.25 41.5,42 41.5,50 35.75,55.75 22,55.75 v22,38.75
MISO  (via drill 0.35)
  Top 0.152: v34.25,33.25 IC12.11 | v36.25,30.25 37.5,29 61,29 62.25,27.75 JP1.1
  Bottom 0.152: v34.25,33.25 36.25,31.25 v36.25,30.25
MOSI  (via drill 0.35)
  Top 0.152: v37.25,37.25 37,37 34.25,37 IC12.10
  Bottom 0.152: v37.25,37.25 38.5,36 38.5,25.75 42.75,21.5 64,21.5 64,29.25 65,30.25 JP1.4
N$1  (via drill 0.35)
  Top 0.152: v22,9.25 23,8.25 LED1.2 | R3.1 v18.25,25.25
  Bottom 0.152: v22,9.25 18.25,13 v18.25,25.25
N$2
  Top 0.152: R4.1 55.5,19.5 51,15 LED2.2
N$3
  Top 0.152: R5.1 LED3.2
N$4
  Top 0.152: R10.1 LED4.2
N$5
  Top 0.152: IC9.6 40.75,20.5 40.75,21.5 IC9.7
N$6
  Top 0.152: J2.1 61,11 54.25,11 52.25,9 S1.5
N$7
  Top 0.152: S1.6 S1.3
N$8
  Top 0.152: IC1.2 58.5,56.75 59,57.25 61.5,57.25 63.25,59 70,59 R12.2
N$12
  Top 0.152: IC1.6 63.75,55.5 72.75,55.5 73.5,56.25 73.5,59.5 70.75,59.5 70.25,60 52.75,60 52,59.25 R16.2
N$13
  Top 0.152: D2.2 40.75,64 41.5,64.75 44.25,64.75 44.25,70 43.75,70.5 42.25,70.5 41.25,69.5 37.25,69.5 37.25,70.75 36.25,71.75 35.75,71.75 U1.1
  Top 0.7: L1.P$2 52.5,64.79 51.71,64 D2.2
N$15
  Top 0.152: IC9.5 40.5,19.25 40,19.75 36,19.75 35.5,20.25 IC9.3 35.25,20.5 34.75,21 29.5,21 29,21.5 27,21.5 25.25,19.75 9.75,19.75 6.75,22.75 6.75,26.75 8.25,26.75 10,28.5 | 10,28.5 R6.1 | 10,28.5 R7.2
N$16  (via drill 0.35)
  Top 0.152: 49.75,18.5 52.25,18.5 53,19.25 D1.1 | 49.75,18.5 33.25,18.5 v32.75,18 31.75,17 C9.2 | R6.2 12,32.5 v22,32.5 | 49.75,18.5 49.75,14.5 49.5,14.25 48.5,14.25 48.25,14.5 34,14.5 34,11.5 32.25,9.75 29.75,9.75 26.75,6.75 IC10.1
  Bottom 0.152: v22,32.5 29,25.5 29,21.75 v32.75,18
N$17  (via drill 0.35)
  Top 0.152: v42,13.25 42.75,13.25 43,13 Q2.1 | v36.75,22.5 36.5,22.75 35.5,22.75 IC9.1
  Bottom 0.152: v42,13.25 36.75,18.5 v36.75,22.5
N$18  (via drill 0.35)
  Top 0.152: v39.25,9 39.25,5.5 J4.2 | R8.2 v20.5,46
  Bottom 0.152: v39.25,9 20.5,27.75 v20.5,46
N$19  (via drill 0.35)
  Top 0.152: v40,9.75 J4.3 | v21.25,55 21,55.25 15.25,55.25 R9.2
  Bottom 0.152: v40,9.75 21.25,28.5 v21.25,55
N$20  (via drill 0.35)
  Top 0.152: v32.75,51 30.75,53 C13.2 | v32.75,40.25 33,40 IC12.6
  Bottom 0.152: v32.75,40.25 v32.75,51
N$21  (via drill 0.35)
  Top 0.152: 36,57.75 38.75,57.75 39.5,57 C14.2 | 36,57.75 31.5,57.75 30.75,57 FL1.2 | v37,42.5 37.75,42.5 43.25,37 45.75,37 IC12.24 | v36.25,44.25 36.25,45.75 IC12.44 v36,47.25 | v36,54.5 36,57.75
  Bottom 0.152: v37,42.5 36.25,43.25 v36.25,44.25 | v36,47.25 v36,54.5
N$22  (via drill 0.35)
  Top 0.152: v40,32.75 IC12.17 | v40.75,48 43.5,50.75 44.25,50.75 45,51.5 45,52 Y1.1
  Bottom 0.152: v40,32.75 40.75,33.5 v40.75,48
N$23  (via drill 0.35)
  Top 0.152: v39.25,32 39.25,34.25 IC12.16 | v40,49 43,52 Y1.3
  Bottom 0.152: v39.25,32 39.25,35.5 40,36.25 v40,49
N$24
  Top 0.152: C15.2 39.5,53 39.5,50.5 37.75,48.75 37.75,45.75 IC12.42
N$25
  Top 0.5: IC13.6 24.1,40.37 24.88,39.59 24.88,38.6 23.79,37.52 6.55,37.52 5.57,36.54 4.43,36.54 3.62,37.35 3.62,38.49 5,39.87 J7.1
N$26
  Top 0.5: IC13.8 19.95,42.91 19.22,43.63 10.71,43.63 J7.2
N$27
  Top 0.5: IC14.8 74.17,42.91 J8.2
N$28
  Top 0.5: IC14.6 71.64,40.37 J8.1
N$31
  Top 0.5: R20.2 22.65,71.72 21.23,71.72 19.46,69.94 19.46,67.99 22.93,64.52 26.91,64.52 32.44,70.05 U1.3
N$32
  Top 0.5: R20.1 22,71.07 26.68,71.07 28.92,73.32 39.27,73.32 40.09,72.5 R21.2
RD+
  Top 0.152: R9.1 9.5,57 9.5,52.25 17,44.75 23.5,44.75 26.5,41.75 34.25,41.75 IC12.4
RD-
  Top 0.152: R8.1 18.25,45.25 23.5,45.25 26.25,42.5 34.25,42.5 IC12.3
RESET  (via drill 0.35)
  Top 0.152: 67,28.25 67.5,27.75 JP1.5 67,28.25 | 67,28.25 66.5,28.75 62.5,28.75 61.75,29.5 52.25,29.5 51,30.75 38.5,30.75 38,30.25 S2.1 v37,31 | v36.75,35.75 36.75,34.25 IC12.13 | R2.1 54,26.5 65.25,26.5 67,28.25
  Bottom 0.152: v36.75,35.75 37,35.5 v37,31
RX-LED  (via drill 0.35)
  Top 0.152: v45,29.75 46,29.75 LED3.1 | v41.5,36.5 39.5,38.5 34.25,38.5 IC12.8
  Bottom 0.152: v45,29.75 41.5,33.25 v41.5,36.5
SCK  (via drill 0.35)
  Top 0.152: v35.75,37.75 34.25,37.75 IC12.9
  Bottom 0.152: v35.75,37.75 38,35.5 38,25.75 42.75,21 65,21 JP1.3
TX-LED  (via drill 0.35)
  Top 0.152: v48,29.75 49,29.75 LED4.1 | IC12.22 v45,33.25
  Bottom 0.152: v48,29.75 45,32.75 v45,33.25
VBUS  (via drill 0.35)
  Top 0.152: v38.5,8.25 38.75,8.25 38.75,5.5 J4.1 | v35.75,11 34.75,12 F1.1
  Bottom 0.152: v35.75,11 v38.5,8.25
VBUSF  (via drill 0.35)
  Top 0.152: Q2.3 F1.2 39.25,12 v38.25,13 | v35.75,39.25 34.25,39.25 IC12.7 | v33.25,31.75 32,30.5 C1.2
  Bottom 0.152: v35.75,39.25 33.25,36.75 v33.25,31.75 33.5,31.5 33.5,17.75 v38.25,13
VCC  (via drill 0.35)
  Top 0.152: 25.25,32.5 27.25,30.5 28,30.5 C10.2 | 25.25,32.5 24.75,33 C11.2 | 25.25,32.5 32,32.5 | 32,32.5 37.5,32.5 37.5,34.25 IC12.14 | R15.2 R19.2 FL1.1 29.5,57 v29.5,54.25 | 34.25,43.25 37.75,43.25 38.75,44.25 43.25,44.25 44,45 IC12.34 | v32,44.75 33.5,43.25 34.25,43.25 | 34.25,43.25 IC12.2 | v32,39.5 32,32.5 | R2.2 62.25,30.5 JP1.2 62.5,30.25 63.5,29.25 67.5,29.25 68.75,28 68.75,24 53,24 48.5,19.5 | R13.2 R14.2 61.5,49.5 | R18.2 R17.2 61.5,49.5 | 66.25,57.5 71.75,57.5 72.5,56.75 R12.3 | 66.25,57.5 64,57.5 63.75,57.75 IC1.8 63.5,57.75 63,57.75 61.25,56 55.25,56 54.75,56.5 R16.3 | 61.5,49.5 61.5,55.25 62,55.25 62.75,56 64.75,56 66.25,57.5 | 46.75,20 47.25,19.5 48.5,19.5 | 46.75,20 43.75,23 40.75,23 IC9.8 40.5,23 39.25,24.25 31.75,24.25 | R5.2 46.5,20 46.75,20 | IC11.1 22,24.25 31.75,24.25 | 46.5,12 48.25,13.75 52,13.75 57.25,19 57.25,20.5 | 46.5,12 45.75,11.25 43.25,11.25 Q2.2 | 57.25,20.5 57.25,22.5 R4.2 | 46.5,12 44.5,14 37.5,14 37.5,11.75 35.75,10 34.75,10 31.5,6.75 IC10.2 | 57.25,20.5 50,20.5 R10.2 48.5,19.5 | 31.75,24.25 v31.75,25
  Bottom 0.152: v29.5,54.25 32,51.75 v32,44.75 v32,39.5 31.75,39.25 v31.75,25 | JP1.2 62.25,30.5 58.5,34.25 58.5,52.75 54.75,56.5 R16.3

## Text on the board
tNames: Roomba V.2.0 | pleap